# EAGLE board Komplet 0.2 (EAGLE 8.5.1)
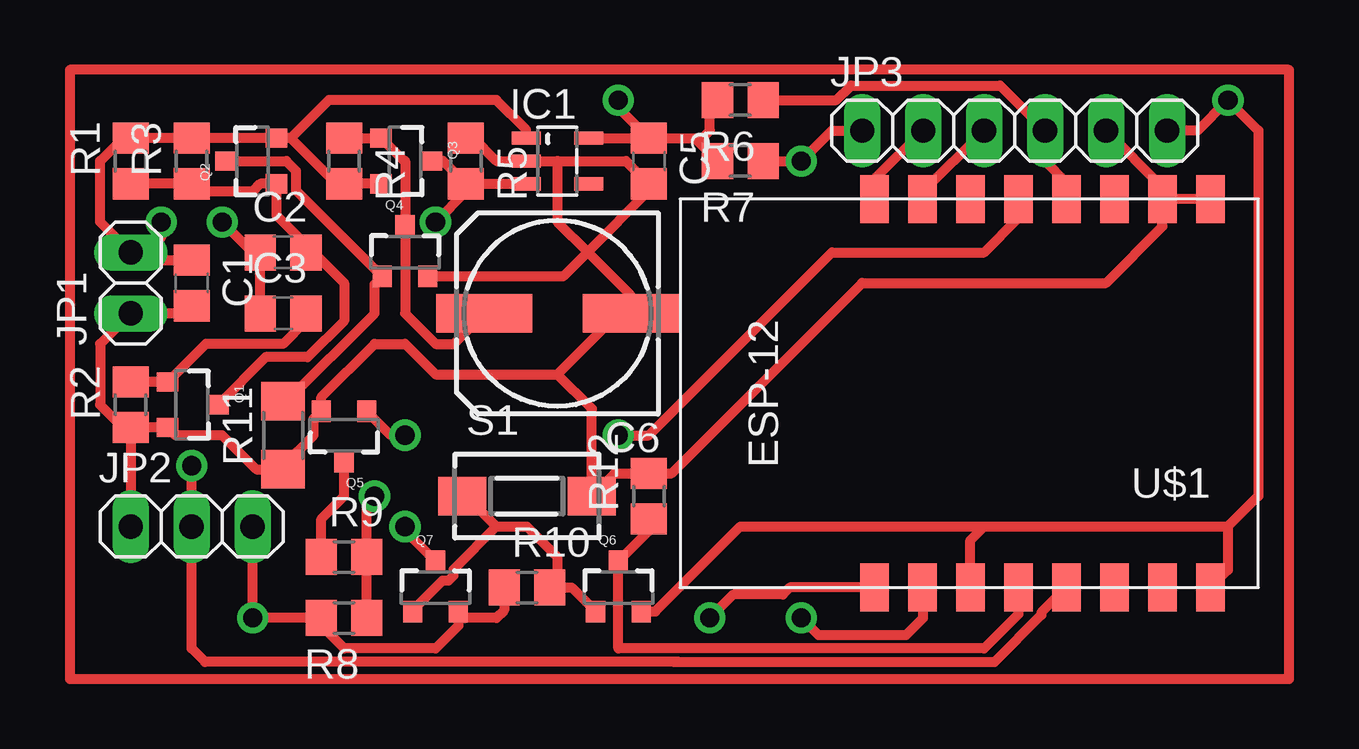
[diagram p0: board, top side]
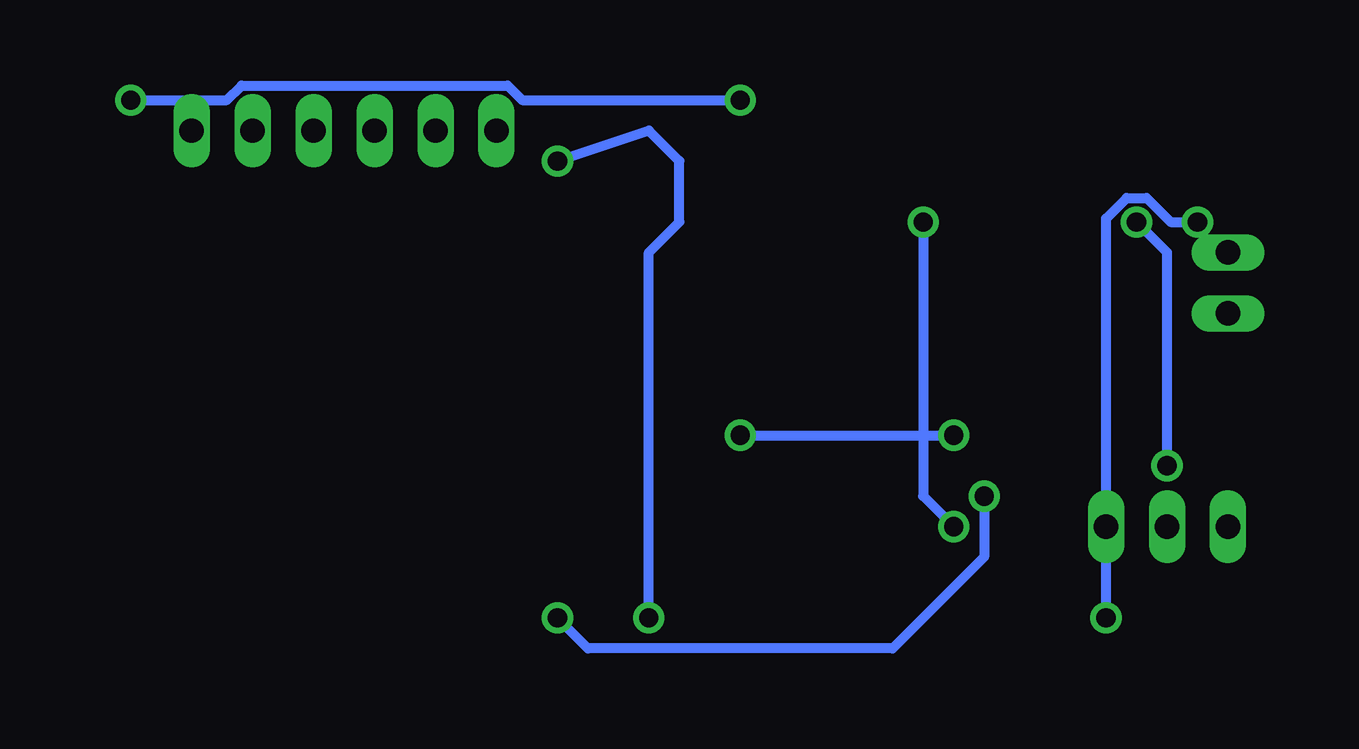
[diagram p1: board, bottom side, seen from below]

No outline drawn. Coordinates in mm, seen from the top.
Copper layers (1*16): Top 0.035mm / dielectric 1.5mm / Bottom 0.035mm
Design rules "default": minimum track width 6mil, minimum drill 0.35mm, track to track 6mil, track to pad 6mil, pad to pad 6mil, via to via 6mil, smd to smd 6mil, copper to edge 40mil, drill to drill 6mil, minimum pad ring 10mil, minimum via ring 8mil, stop-mask expansion 4mil, vias tented up to drill 0mil, thermal gap 10mil

## Footprints (pad centres in the part's own frame; a part is rotated, then mirrored left to right if it is on the bottom)
C0805 = smd 1.3 x 1.5: 1 -0.95,0; 2 0.95,0
153CLV-0807 = smd 4 x 1.6: + 3.05,0; - -3.05,0
SOT23-5 = smd 1.2 x 0.55: 1 -1.3,0.95; 2 -1.3,0; 3 -1.3,-0.95; 4 1.3,-0.95; 5 1.3,0.95
1X02 = drill 1.016 long: 1 -1.27,0; 2 1.27,0
1X03 = drill 1.016 long: 1 -2.54,0; 2 0,0; 3 2.54,0
1X06 = drill 1.016 long: 1 -6.35,0; 2 -3.81,0; 3 -1.27,0; 4 1.27,0; 5 3.81,0; 6 6.35,0
SOT23-3 = smd 0.8 x 0.9: 1 -0.95,-1; 2 0.95,-1; 3 0,1.1
R0805 = smd 1.3 x 1.5: 1 -0.95,0; 2 0.95,0
R1206 = smd 1.6 x 1.803: 1 -1.422,0; 2 1.422,0
DTSM-3 = smd 2 x 1.6: 1 -2.7,0; 2 2.7,0
ESP8266-ESP12 = smd 2 x 1.2: 1 16.2,2; 2 16.2,4; 3 16.2,6; 4 16.2,8; 5 16.2,10; 6 16.2,12; 7 16.2,14; 8 16.2,16; 9 0,16; 10 0,14; 11 0,12; 12 0,10; 13 0,8; 14 0,6; 15 0,4; 16 0,2

## Placement (x,y rotation side)
C1  [C0805]  8.89,54.61 270 top
C2  [C0805]  12.7,55.88 0 top
C3  [C0805]  12.7,53.34 0 top
C5  [C0805]  27.94,59.69 270 top
C6  [153CLV-0807]  24.13,53.34 180 top
IC1  [SOT23-5]  24.13,59.69 0 top
JP1  [1X02]  6.35,54.61 90 top
JP2  [1X03]  8.89,44.45 0 top
JP3  [1X06]  43.18,60.96 0 top
Q1  MOSFET-NCHANNEL_SOT23-3  [SOT23-3]  8.89,49.53 270 top
Q2  MOSFET-PCHANNEL_SOT23-3  [SOT23-3]  11.43,59.69 90 top
Q3  MOSFET-PCHANNEL_SOT23-3  [SOT23-3]  17.78,59.69 270 top
Q4  MOSFET-NCHANNEL_SOT23-3  [SOT23-3]  17.78,55.88 0 top
Q5  MOSFET-NCHANNEL_SOT23-3  [SOT23-3]  15.24,48.26 180 top
Q6  MOSFET-PCHANNEL_SOT23-3  [SOT23-3]  26.67,41.91 0 top
Q7  MOSFET-PCHANNEL_SOT23-3  [SOT23-3]  19.05,41.91 0 top
R1  [R0805]  6.35,59.69 90 top
R2  [R0805]  6.35,49.53 90 top
R3  [R0805]  8.89,59.69 90 top
R4  [R0805]  15.24,59.69 270 top
R5  [R0805]  20.32,59.69 270 top
R6  [R0805]  31.75,62.23 180 top
R7  [R0805]  31.75,59.69 180 top
R8  [R0805]  15.24,40.64 180 top
R9  [R0805]  15.24,43.18 0 top
R10  [R0805]  22.86,41.91 0 top
R11  [R1206]  12.7,48.26 90 top
R12  [R0805]  27.94,45.72 90 top
S1  DTSM-3  [DTSM-3]  22.86,45.72 0 top
U$1  ESP8266_ESP-12  [ESP8266-ESP12]  53.34,41.91 90 top

## Library data of the parts
C1-C3 C5 C6 R1-R12 = rcl
IC1 = m_vreg; MANUF: TI; PARTNUM: TLV700??DDC?
JP1-JP3 = untitled
Q1-Q7 = Simplex-DiscreteSemi
S1 = switch-tact
U$1 = ESP8266-ESP12

## Nets
3V3: C5.1 IC1.5 JP3.6 Q6.2 R6.2 R7.2 U$1.11 U$1.16
GND: C1.2 C5.2 C6.- IC1.2 JP1.1 JP2.1 JP3.5 Q1.2 Q4.2 Q5.2 R2.1 R5.1 R11.1 R12.2 S1.2 U$1.1 U$1.2
N$1: C6.+ Q3.1 Q4.3 R4.1
N$4: C2.2 Q1.3 Q2.1 R1.1 R3.1
N$5: Q2.3 Q4.1 R11.2
N$6: C3.2 Q1.1 R2.2
N$7: Q6.3 R12.1 U$1.12
N$9: Q5.1 U$1.5
N$10: JP3.4 R6.1 U$1.4
N$11: JP3.3 U$1.7
N$12: IC1.3 Q3.3 Q7.3 R5.2
N$13: JP3.2 U$1.8
N$14: JP3.1 R7.1 U$1.9
N$15: Q6.1 Q7.1 R10.2 S1.1
N$16: Q5.3 R9.1
N$17: R8.1 R9.2 U$1.10
SIGNAL: C2.1 C3.1 JP2.2 U$1.13
V++: C1.1 IC1.1 JP1.2 JP2.3 Q2.2 Q3.2 Q7.2 R1.2 R3.2 R4.2 R8.2 R10.1

## Tracks (layer width: path | path; a pad name or v marks a point on that pad's centre or on a via)
3V3  (via drill 0.8 pad 1.3)
  Top 0.406: 29.85,60.64 C5.1 27.78,60.8 | 29.85,60.64 R7.2 | 29.85,60.64 30.16,60.64 30.48,60.96 30.48,61.91 R6.2 30.48,62.23 | 52.07,44.45 52.07,42.64 U$1.16 | U$1.11 41.34,43.88 41.91,44.45 | 41.91,44.45 52.07,44.45 | JP3.6 50.8,60.96 v52.07,62.23 53.34,60.96 53.34,45.72 52.07,44.45 | v26.67,62.23 26.67,61.91 27.78,60.8 | IC1.5 27.62,60.64 27.78,60.8 | 41.91,44.45 31.75,44.45 28.21,40.91 Q6.2
  Bottom 0.406: v52.07,62.23 48.06,62.23 47.45,62.84 36.37,62.84 35.76,62.23 v26.67,62.23
GND
  Top 0.406: C1.2 8.57,53.34 JP1.1 5.08,52.07 5.08,49.53 6.35,48.26 R2.1 | R2.1 Q1.2 8.21,48.26 10.16,48.26 11.58,46.84 R11.1 12.7,46.99 13.97,48.26 13.97,48.94 Q5.2 14.29,49.85 16.51,52.07 17.78,52.07 19.05,50.8 24.13,50.8 | R2.1 JP2.1 | R5.1 20.64,60.64 21.59,59.69 IC1.2 24.13,59.69 | Q4.2 24.37,54.88 25.39,55.9 | 25.39,55.9 27.94,58.45 C5.2 27.04,59.63 | 27.04,59.63 26.99,59.69 24.13,59.69 | 27.04,59.63 27.05,59.63 | 24.13,59.69 24.13,57.15 25.39,55.9 | 25.39,55.9 27.18,54.1 C6.- 26.67,53.34 24.13,50.8 | U$1.1 U$1.2 | U$1.2 49.34,58.61 JP3.5 | 24.13,50.8 25.56,49.37 S1.2 26.51,46.67 R12.2 28.89,46.67 36.83,54.61 46.99,54.61 49.34,56.96 U$1.2
N$1
  Top 0.406: 17.78,59.64 Q4.3 17.78,53.34 19.05,52.07 19.81,52.07 C6.+ | 17.78,59.64 17.78,59.69 17.78,59.64 | R4.1 Q3.1 17.78,59.64
N$2
  Top 0.406: 3.81,63.5 3.81,38.1 54.61,38.1 54.61,63.5 3.81,63.5
N$4
  Top 0.406: R1.1 R3.1 9.21,58.42 11.43,58.42 11.75,58.74 Q2.1 12.43,57.42 13.81,56.04 C2.2 13.97,55.88 15.24,54.61 15.24,53.03 13.72,51.51 11.97,51.51 Q1.3
N$5
  Top 0.406: Q2.3 12.83,59.69 13.24,59.29 13.24,58.47 Q4.1 16.51,54.56 16.51,53.34 12.85,49.68 R11.2
N$6
  Top 0.406: R2.2 Q1.1 9.48,52.07 10.16,52.07 12.7,52.07 13.65,53.02 C3.2 | R2.2 6.35,50.8 R2.2
N$7
  Top 0.406: U$1.12 43.34,40.8 41.91,39.37 26.67,39.37 Q6.3 27.94,44.28 R12.1
N$9  (via drill 0.8 pad 1.3)
  Top 0.406: U$1.5 43.34,57.31 41.91,55.88 35.56,55.88 27.94,48.26 v26.67,48.26 | v17.78,48.26 17.19,48.26 Q5.1
  Bottom 0.406: v26.67,48.26 v17.78,48.26
N$10
  Top 0.406: U$1.4 45.34,58.8 44.45,59.69 JP3.4 42.57,62.84 36.37,62.84 35.76,62.23 R6.1
N$11
  Top 0.406: U$1.7 39.34,58.39 JP3.3
N$12  (via drill 0.35, 0.8 pad 1.3)
  Top 0.406: R5.2 19.43,59.63 19.42,59.63 19.37,59.69 Q3.3 | R5.2 IC1.3 | R5.2 20.32,58.42 v19.05,57.15 | v17.78,44.45 17.78,44.28 Q7.3
  Bottom 0.406: v19.05,57.15 19.05,45.72 v17.78,44.45
N$13
  Top 0.406: 37.34,57.66 U$1.8 37.34,58.93 JP3.2
N$14  (via drill 0.8 pad 1.3)
  Top 0.406: 36.83,41.91 U$1.9 33.81,41.91 33.52,41.62 31.46,41.62 v30.48,40.64 | R7.1 v34.29,59.69 35.56,60.96 JP3.1
  Bottom 0.406: v30.48,40.64 30.48,55.88 29.21,57.15 29.21,59.69 30.48,60.96 v34.29,59.69
N$15
  Top 0.406: Q7.1 18.1,40.96 19.34,42.2 19.6,42.2 19.81,42.41 19.81,42.67 21.59,44.45 | 21.59,44.45 22.86,44.45 24.13,43.18 24.13,42.23 R10.2 24.72,41.91 Q6.1 | S1.1 20.32,45.72 21.59,44.45
N$16
  Top 0.406: R9.1 14.29,44.77 15.24,45.72 Q5.3
N$17  (via drill 0.8 pad 1.3)
  Top 0.406: U$1.10 39.37,41.91 39.37,40.64 38.66,39.93 35,39.93 v34.29,40.64 | R8.1 R9.2 | R9.2 16.51,43.18 | R9.2 16.19,45.4 v16.51,45.72
  Bottom 0.406: v16.51,45.72 16.51,43.18 20.32,39.37 33.02,39.37 v34.29,40.64
SIGNAL  (via drill 0.35, 0.8 pad 1.3)
  Top 0.406: 11.43,55.88 C2.1 | 11.43,55.88 v10.16,57.15 | C3.1 11.75,55.56 11.43,55.88 | v8.89,46.99 JP2.2 8.89,39.37 9.45,38.81 29.21,38.81 | U$1.13 44.3,40.87 44.3,40.76 42.34,38.81 29.21,38.81 | 28.98,38.81 29.21,38.81
  Bottom 0.406: v8.89,46.99 8.89,55.88 v10.16,57.15
V++  (via drill 0.8 pad 1.3)
  Top 0.406: 6.67,55.56 C1.1 8.89,55.88 | 6.67,55.56 JP1.2 5.08,57.15 5.08,59.69 6.35,60.96 R1.2 R3.2 Q2.2 13.02,60.64 | 16.46,58.74 16.51,58.69 16.73,58.69 Q3.2 R4.2 15.08,58.58 | 15.08,58.58 13.02,60.64 | 15.08,58.58 15.24,58.42 | IC1.1 22.83,60.99 21.59,62.23 14.61,62.23 13.02,60.64 | JP2.3 v11.43,40.64 13.97,40.64 | 13.97,40.64 R8.2 | 13.97,40.64 15.24,39.37 19.05,39.37 20,40.32 Q7.2 20.27,40.64 21.59,40.64 21.91,40.96 R10.1 | v7.62,57.15 7.62,56.51 6.67,55.56
  Bottom 0.406: v7.62,57.15 8.74,57.15 9.74,58.16 10.58,58.16 11.43,57.3 v11.43,40.64